# EAGLE board main (EAGLE 9.6.0)

Size 100 x 80 mm. Coordinates in mm from the lower left corner, seen from the top.
Outline: 0,0 100,0 100,80 0,80 0,0
Copper layers (1*16): Top 0.105mm / dielectric 1.55mm / Bottom 0.105mm
Design rules "default": minimum track width 0.5mm, minimum drill 0.8mm, track to track 0.25mm, track to pad 0.25mm, pad to pad 0.25mm, via to via 0.25mm, smd to smd 0mil, copper to edge 0mil, drill to drill 0.35mm, minimum pad ring 0.25mm, minimum via ring 0.5mm, stop-mask expansion 0mil, vias tented up to drill 0.45mm, thermal gap 0.2mm

## Footprints (pad centres in the part's own frame; a part is rotated, then mirrored left to right if it is on the bottom)
CCMS1206 = smd 1.6 x 1.803: 1 -1.6,0; 2 1.6,0
DO-41-10 = drill 1.016 pad 1.778 long: A 5.08,0 | drill 1.016 pad 2.54 square: C -5.08,0
SOIC127P1030X265-24N = smd 1.95 x 0.65: 1 -4.725,6.985; 2 -4.725,5.715; 3 -4.725,4.445; 4 -4.725,3.175; 5 -4.725,1.905; 6 -4.725,0.635; 7 -4.725,-0.635; 8 -4.725,-1.905; 9 -4.725,-3.175; 10 -4.725,-4.445; 11 -4.725,-5.715; 12 -4.725,-6.985; 13 4.725,-6.985; 14 4.725,-5.715; 15 4.725,-4.445; 16 4.725,-3.175; 17 4.725,-1.905; 18 4.725,-0.635; 19 4.725,0.635; 20 4.725,1.905; 21 4.725,3.175; 22 4.725,4.445; 23 4.725,5.715; 24 4.725,6.985
AK500/3 = drill 1.2 pad 2.794 long: 1 -5.004,0; 2 0,0; 3 5.004,0
MSTBA2 = drill 1.499 pad 2.794 long: 1 -2.54,0; 2 2.54,0
JP4 = drill 0.914 long: 1 -3.81,0; 2 -1.27,0; 3 1.27,0; 4 3.81,0
JP1 = drill 0.914 long: 1 0,-1.27; 2 0,1.27
TSR12450E = drill 0.83 pad 1.4: 1 0,0; 2 2.54,0; 3 5.08,0
TSR-1-2433 = drill 0.78 pad 1.28: 1 -2.54,0; 2 0,0; 3 2.54,0
RCMS1206 = smd 1.778 x 1.854: 1 -1.803,0; 2 1.803,0
D2PACK = smd 2.083 x 3.81: 1 -2.54,-8.89; 3 2.54,-8.89 | smd 11.43 x 8.89: 2 0,2.54
DIL16 = drill 0.8 pad 1.8 square: 1 -8.89,-3.81 | drill 0.8 pad 1.5 long: 2 -6.35,-3.81; 3 -3.81,-3.81; 4 -1.27,-3.81; 5 1.27,-3.81; 6 3.81,-3.81; 7 6.35,-3.81; 8 8.89,-3.81; 9 8.89,3.81; 10 6.35,3.81; 11 3.81,3.81; 12 1.27,3.81; 13 -1.27,3.81; 14 -3.81,3.81; 15 -6.35,3.81; 16 -8.89,3.81
ESP8266-NODEMCU = drill 1.016 pad 1.676 long: 1 11.43,-19.05; 2 11.43,-16.51; 3 11.43,-13.97; 4 11.43,-11.43; 5 11.43,-8.89; 6 11.43,-6.35; 7 11.43,-3.81; 8 11.43,-1.27; 9 11.43,1.27; 10 11.43,3.81; 11 11.43,6.35; 12 11.43,8.89; 13 11.43,11.43; 14 11.43,13.97; 15 11.43,16.51; 16 -11.43,16.51; 17 -11.43,13.97; 18 -11.43,11.43; 19 -11.43,8.89; 20 -11.43,6.35; 21 -11.43,3.81; 22 -11.43,1.27; 23 -11.43,-1.27; 24 -11.43,-3.81; 25 -11.43,-6.35; 26 -11.43,-8.89; 27 -11.43,-11.43; 28 -11.43,-13.97; 29 -11.43,-16.51; 30 -11.43,-19.05

## Placement (x,y rotation side)
C1  0.1u  [CCMS1206]  -147.32,-27.94 0 top  (outside the outline)
C2  100n  [CCMS1206]  -147.32,-67.31 0 top  (outside the outline)
C3  100n  [CCMS1206]  -147.32,-120.65 0 top  (outside the outline)
D1  1N4007  [DO-41-10]  -20.32,109.22 0 top  (outside the outline)
D2  1N4007  [DO-41-10]  -34.29,109.22 0 top  (outside the outline)
D3  1N4007  [DO-41-10]  -48.26,109.22 0 top  (outside the outline)
D4  1N4007  [DO-41-10]  -62.23,109.22 0 top  (outside the outline)
D5  1N4007  [DO-41-10]  -76.2,109.22 0 top  (outside the outline)
D6  1N4007  [DO-41-10]  -90.17,109.22 0 top  (outside the outline)
D7  1N4007  [DO-41-10]  -20.32,116.84 0 top  (outside the outline)
D8  1N4007  [DO-41-10]  -34.29,116.84 0 top  (outside the outline)
D9  1N4007  [DO-41-10]  -48.26,116.84 0 top  (outside the outline)
D10  1N4007  [DO-41-10]  -62.23,116.84 0 top  (outside the outline)
D11  1N4007  [DO-41-10]  -76.2,116.84 0 top  (outside the outline)
D12  1N4007  [DO-41-10]  -90.17,116.84 0 top  (outside the outline)
D13  1N4007  [DO-41-10]  -20.32,124.46 0 top  (outside the outline)
D14  1N4007  [DO-41-10]  -34.29,124.46 0 top  (outside the outline)
D15  1N4007  [DO-41-10]  -48.26,124.46 0 top  (outside the outline)
D16  1N4007  [DO-41-10]  -62.23,124.46 0 top  (outside the outline)
D17  1N4007  [DO-41-10]  -76.2,124.46 0 top  (outside the outline)
D18  1N4007  [DO-41-10]  -90.17,124.46 0 top  (outside the outline)
D19  1N4007  [DO-41-10]  -20.32,132.08 0 top  (outside the outline)
D20  1N4007  [DO-41-10]  -34.29,132.08 0 top  (outside the outline)
D21  1N4007  [DO-41-10]  -48.26,132.08 0 top  (outside the outline)
D22  1N4007  [DO-41-10]  -62.23,132.08 0 top  (outside the outline)
D23  1N4007  [DO-41-10]  -76.2,132.08 0 top  (outside the outline)
D24  1N4007  [DO-41-10]  -90.17,132.08 0 top  (outside the outline)
IC1  CD74HCT4067M  [SOIC127P1030X265-24N]  -143.51,-15.24 0 top  (outside the outline)
J1  [AK500/3]  43.18,74.93 180 top
J2  [AK500/3]  60.96,74.93 180 top
J3  [AK500/3]  78.74,74.93 180 top
J4  [AK500/3]  25.4,74.93 180 top
J5  Batterie_IN  [MSTBA2]  -157.48,-175.26 0 top  (outside the outline)
JP1  sdCard  [JP4]  -144.78,-73.66 0 top  (outside the outline)
JP2  analog_cam  [JP4]  -144.78,-82.55 0 top  (outside the outline)
JP3  digital_cam  [JP4]  -144.78,-90.17 0 top  (outside the outline)
JP4  digital_cam_2  [JP4]  -144.78,-127 0 top  (outside the outline)
JP5  sd_alim  [JP1]  -154.94,-138.43 0 top  (outside the outline)
JP6  [JP1]  -162.56,-138.43 0 top  (outside the outline)
JP7  cam_alim  [JP1]  -162.56,-158.75 0 top  (outside the outline)
JP8  cam_rst_pwdn  [JP1]  -162.56,-167.64 0 top  (outside the outline)
PS1  TSR_1-2450E  [TSR12450E]  -161.29,-193.04 0 top  (outside the outline)
PS2  TSR_1-2433E  [TSR-1-2433]  -160.02,-203.2 0 top  (outside the outline)
R1  1M  [RCMS1206]  -100.33,130.81 0 top  (outside the outline)
R2  1k  [RCMS1206]  -106.68,130.81 0 top  (outside the outline)
R3  10k  [RCMS1206]  -16.51,138.43 0 top  (outside the outline)
R4  10k  [RCMS1206]  -22.86,138.43 0 top  (outside the outline)
R5  10k  [RCMS1206]  -29.21,138.43 0 top  (outside the outline)
R6  1M  [RCMS1206]  -35.56,138.43 0 top  (outside the outline)
R7  1k  [RCMS1206]  -41.91,138.43 0 top  (outside the outline)
R8  10k  [RCMS1206]  -48.26,138.43 0 top  (outside the outline)
R9  10k  [RCMS1206]  -54.61,138.43 0 top  (outside the outline)
R10  10k  [RCMS1206]  -60.96,138.43 0 top  (outside the outline)
R11  1M  [RCMS1206]  -67.31,138.43 0 top  (outside the outline)
R12  1k  [RCMS1206]  -73.66,138.43 0 top  (outside the outline)
R13  10k  [RCMS1206]  -80.01,138.43 0 top  (outside the outline)
R14  10k  [RCMS1206]  -86.36,138.43 0 top  (outside the outline)
R15  10k  [RCMS1206]  -92.71,138.43 0 top  (outside the outline)
R16  1M  [RCMS1206]  -99.06,138.43 0 top  (outside the outline)
R17  1k  [RCMS1206]  -105.41,138.43 0 top  (outside the outline)
R18  10k  [RCMS1206]  -16.51,144.78 0 top  (outside the outline)
R19  10k  [RCMS1206]  -22.86,144.78 0 top  (outside the outline)
R20  10k  [RCMS1206]  -29.21,144.78 0 top  (outside the outline)
R21  10k  [RCMS1206]  -147.32,-33.02 0 top  (outside the outline)
R22  4.7k  [RCMS1206]  -147.32,-134.62 0 top  (outside the outline)
R23  4.7k  [RCMS1206]  -147.32,-139.7 0 top  (outside the outline)
R24  10k  [RCMS1206]  -162.56,-146.05 0 top  (outside the outline)
R25  10k  [RCMS1206]  -162.56,-151.13 0 top  (outside the outline)
T1  BTIRF3710S  [D2PACK]  24.13,57.15 0 top
T2  BTIRF3710S  [D2PACK]  38.1,29.21 0 top
T3  BTIRF3710S  [D2PACK]  38.1,57.15 0 top
T16  BTIRF3710S  [D2PACK]  52.07,57.15 0 top
T17  BTIRF3710S  [D2PACK]  52.07,29.21 0 top
T18  BTIRF3710S  [D2PACK]  13.97,29.21 0 top
T19  BTIRF3710S  [D2PACK]  -35.56,76.2 0 top  (outside the outline)
T20  BTIRF3710S  [D2PACK]  -49.53,76.2 0 top  (outside the outline)
T21  BTIRF3710S  [D2PACK]  -63.5,76.2 0 top  (outside the outline)
T22  BTIRF3710S  [D2PACK]  -77.47,76.2 0 top  (outside the outline)
T23  BTIRF3710S  [D2PACK]  -91.44,76.2 0 top  (outside the outline)
T24  BTIRF3710S  [D2PACK]  -21.59,96.52 0 top  (outside the outline)
U1  74HC595N  [DIL16]  -138.43,-41.91 0 top  (outside the outline)
U2  ESP8266-NODEMCU  [ESP8266-NODEMCU]  -123.19,2.54 0 top  (outside the outline)
U3  74HC595N  [DIL16]  -138.43,-100.33 0 top  (outside the outline)

## Library data of the parts
C1-C3 R1-R25 = 0IUT RLCQ; MAGASIN: (MAG-CMS)
D1-D24 = 0IUT DT; MAGASIN: DIODES (Tiroirs n°4-5)
IC1 = CD74HCT4067M; DESCRIPTION: High-speed CMOS 16-channel analog multiplexer & demultiplexer with TTL inputs; HEIGHT: 2.65mm; MANUFACTURER_NAME: Texas Instruments; MANUFACTURER_PART_NUMBER: CD74HCT4067M; MOUSER_PART_NUMBER: 595-CD74HCT4067M; MOUSER_PRICE-STOCK: https://www.mouser.co.uk/ProductDetail/Texas-Instruments/CD74HCT4067M?qs=vul0MlC%2Fa1fex%2F7NLRWpgQ%3D%3D
J1-J4 = 0IUT CONNECTEURS; MAGASIN: Bornier A3P (Armoire n°4)
J5 = 0IUT CONNECTEURS; MAGASIN: Bornier D2P (Armoire n°4) Bornier D2PF (Armoire n°4)
JP1-JP8 = jumper
PS1 = TSR_1-2450E; DESCRIPTION: 1 Amp POL converter, industrial, 6-36 VDC input, pos.-pos. circuit, cost efficient, LM78 compatible, SIP-3; HEIGHT: 10.6mm; MANUFACTURER_NAME: Traco Power; MANUFACTURER_PART_NUMBER: TSR 1-2450E; MOUSER_PART_NUMBER: 495-TSR1-2450E; MOUSER_PRICE-STOCK: https://www.mouser.co.uk/ProductDetail/TRACO-Power/TSR-1-2450E?qs=vmHwEFxEFR%2FlQnbAtEoeVA%3D%3D
PS2 = TSR_1-2433E; DESCRIPTION: 1 Amp POL converter, industrial, 6-36 VDC input, pos.-pos. circuit, cost efficient, LM78 compatible, SIP-3; HEIGHT: mm; MANUFACTURER_NAME: Traco Power; MANUFACTURER_PART_NUMBER: TSR 1-2433E; MOUSER_PART_NUMBER: 495-TSR1-2433E; MOUSER_PRICE-STOCK: https://www.mouser.co.uk/ProductDetail/TRACO-Power/TSR-1-2433E?qs=vmHwEFxEFR9haWIzn8wG3A%3D%3D
T1-T3 T16-T24 = librairie_drone
U1 U3 = 0IUT CI LOGIQUES; MAGASIN: 74 HC 595 (Armoire n°4) KYT 16 (Armoire n°5)
U2 = 0IUT xPROJETS; LIB: DIV

## Nets
+3,3V: C1.2 C2.1 C3.1 IC1.24 JP5.1 JP7.1 JP8.1 PS2.3 R24.2 R25.2 U1.10 U1.16 U2.11 U2.16 U2.25 U3.10 U3.16
+5V: PS1.3 U2.15
+24V: J1.2 J2.2 J3.2 J4.2 J5.1 PS1.1 PS2.1 R1.2 R6.2 R11.2 R16.2
GND: C2.2 C3.2 J5.2 JP5.2 JP7.2 JP8.2 PS1.2 PS2.2 R21.1 R23.1 T1.3 T2.3 T3.3 T16.3 T17.3 T18.3 T19.3 T20.3 T21.3 T22.3 T23.3 T24.3 U1.8 U1.13 U2.10 U2.14 U2.17 U2.24 U3.8 U3.13
N$1: D4.C R4.1 T2.2
N$2: D1.C D2.C D3.C R1.1 R2.1
N$3: D1.A D4.A R5.1 T1.1
N$4: D2.A D5.A R3.2 T2.1
N$5: D3.A D6.A R4.2 T3.1
N$6: D6.C J1.3 R3.1 T1.2
N$7: IC1.9 R2.2
N$8: D7.A D10.A R10.1 T16.1
N$9: D5.C J1.1 R5.2 T3.2
N$10: D8.A D11.A R8.2 T17.1
N$11: D7.C D8.C D9.C R6.1 R7.1
N$12: D9.A D12.A R9.2 T18.1
N$13: D10.C R9.1 T17.2
N$14: D12.C J2.3 R8.1 T16.2
N$15: IC1.8 R7.2
N$16: D11.C J2.1 R10.2 T18.2
N$17: D13.A D16.A R15.1 T19.1
N$18: D14.A D17.A R13.2 T20.1
N$19: D13.C D14.C D15.C R11.1 R12.1
N$20: D15.A D18.A R14.2 T21.1
N$21: D16.C R14.1 T20.2
N$22: D18.C J3.3 R13.1 T19.2
N$23: IC1.7 R12.2
N$24: D17.C J3.1 R15.2 T21.2
N$25: D19.A D22.A R20.1 T22.1
N$26: D20.A D23.A R18.2 T23.1
N$27: D19.C D20.C D21.C R16.1 R17.1
N$28: D21.A D24.A R19.2 T24.1
N$29: D22.C R19.1 T23.2
N$30: D24.C J4.3 R18.1 T22.2
N$31: IC1.6 R17.2
N$32: D23.C J4.1 R20.2 T24.2
N$33: JP1.1 U1.15
N$34: JP1.2 U1.1
N$35: JP1.3 U1.2
N$36: JP1.4 U1.3
N$37: IC1.13 U3.1
N$38: C1.1 IC1.12
N$39: IC1.14 U3.15
N$40: IC1.11 U3.2
N$41: IC1.10 U3.3
N$42: IC1.1 U2.1
N$43: IC1.15 R21.2
N$44: U1.11 U2.30
N$45: U1.12 U2.29
N$46: U1.14 U2.28
N$47: JP3.1 U1.4
N$48: JP3.2 U1.5
N$49: JP3.3 U1.6
N$50: JP3.4 U1.7
N$51: IC1.5 JP2.4
N$52: IC1.4 JP2.3
N$53: IC1.3 JP2.2
N$54: IC1.2 JP2.1
N$55: U2.27 U3.11
N$56: U2.26 U3.12
N$57: U2.23 U3.14
N$58: JP4.1 U3.4
N$59: JP4.2 U3.5
N$60: JP4.3 U3.6
N$61: JP4.4 R22.2
N$62: IC1.16 JP6.1 R25.1
N$63: R22.1 R23.2 U3.7
N$64: IC1.17 JP6.2 R24.1

## Tracks (layer width: path | path; a pad name or v marks a point on that pad's centre or on a via)
+3,3V  (16 unrouted)
+5V  (1 unrouted)
+24V  (10 unrouted)
GND  (29 unrouted)
N$1  (2 unrouted)
N$2  (4 unrouted)
N$3  (3 unrouted)
N$4  (3 unrouted)
N$5  (3 unrouted)
N$6  (3 unrouted)
N$7  (1 unrouted)
N$8  (3 unrouted)
N$9  (3 unrouted)
N$10  (3 unrouted)
N$11  (4 unrouted)
N$12  (3 unrouted)
N$13  (2 unrouted)
N$14  (3 unrouted)
N$15  (1 unrouted)
N$16  (3 unrouted)
N$17  (3 unrouted)
N$18  (3 unrouted)
N$19  (4 unrouted)
N$20  (3 unrouted)
N$21  (2 unrouted)
N$22  (3 unrouted)
N$23  (1 unrouted)
N$24  (3 unrouted)
N$25  (3 unrouted)
N$26  (3 unrouted)
N$27  (4 unrouted)
N$28  (3 unrouted)
N$29  (2 unrouted)
N$30  (3 unrouted)
N$31  (1 unrouted)
N$32  (3 unrouted)
N$33  (1 unrouted)
N$34  (1 unrouted)
N$35  (1 unrouted)
N$36  (1 unrouted)
N$37  (1 unrouted)
N$38  (1 unrouted)
N$39  (1 unrouted)
N$40  (1 unrouted)
N$41  (1 unrouted)
N$42  (1 unrouted)
N$43  (1 unrouted)
N$44  (1 unrouted)
N$45  (1 unrouted)
N$46  (1 unrouted)
N$47  (1 unrouted)
N$48  (1 unrouted)
N$49  (1 unrouted)
N$50  (1 unrouted)
N$51  (1 unrouted)
N$52  (1 unrouted)
N$53  (1 unrouted)
N$54  (1 unrouted)
N$55  (1 unrouted)
N$56  (1 unrouted)
N$57  (1 unrouted)
N$58  (1 unrouted)
N$59  (1 unrouted)
N$60  (1 unrouted)
N$61  (1 unrouted)
N$62  (2 unrouted)
N$63  (2 unrouted)
N$64  (2 unrouted)